# EAGLE board PlytkaZasilanie (EAGLE 9.7.0)
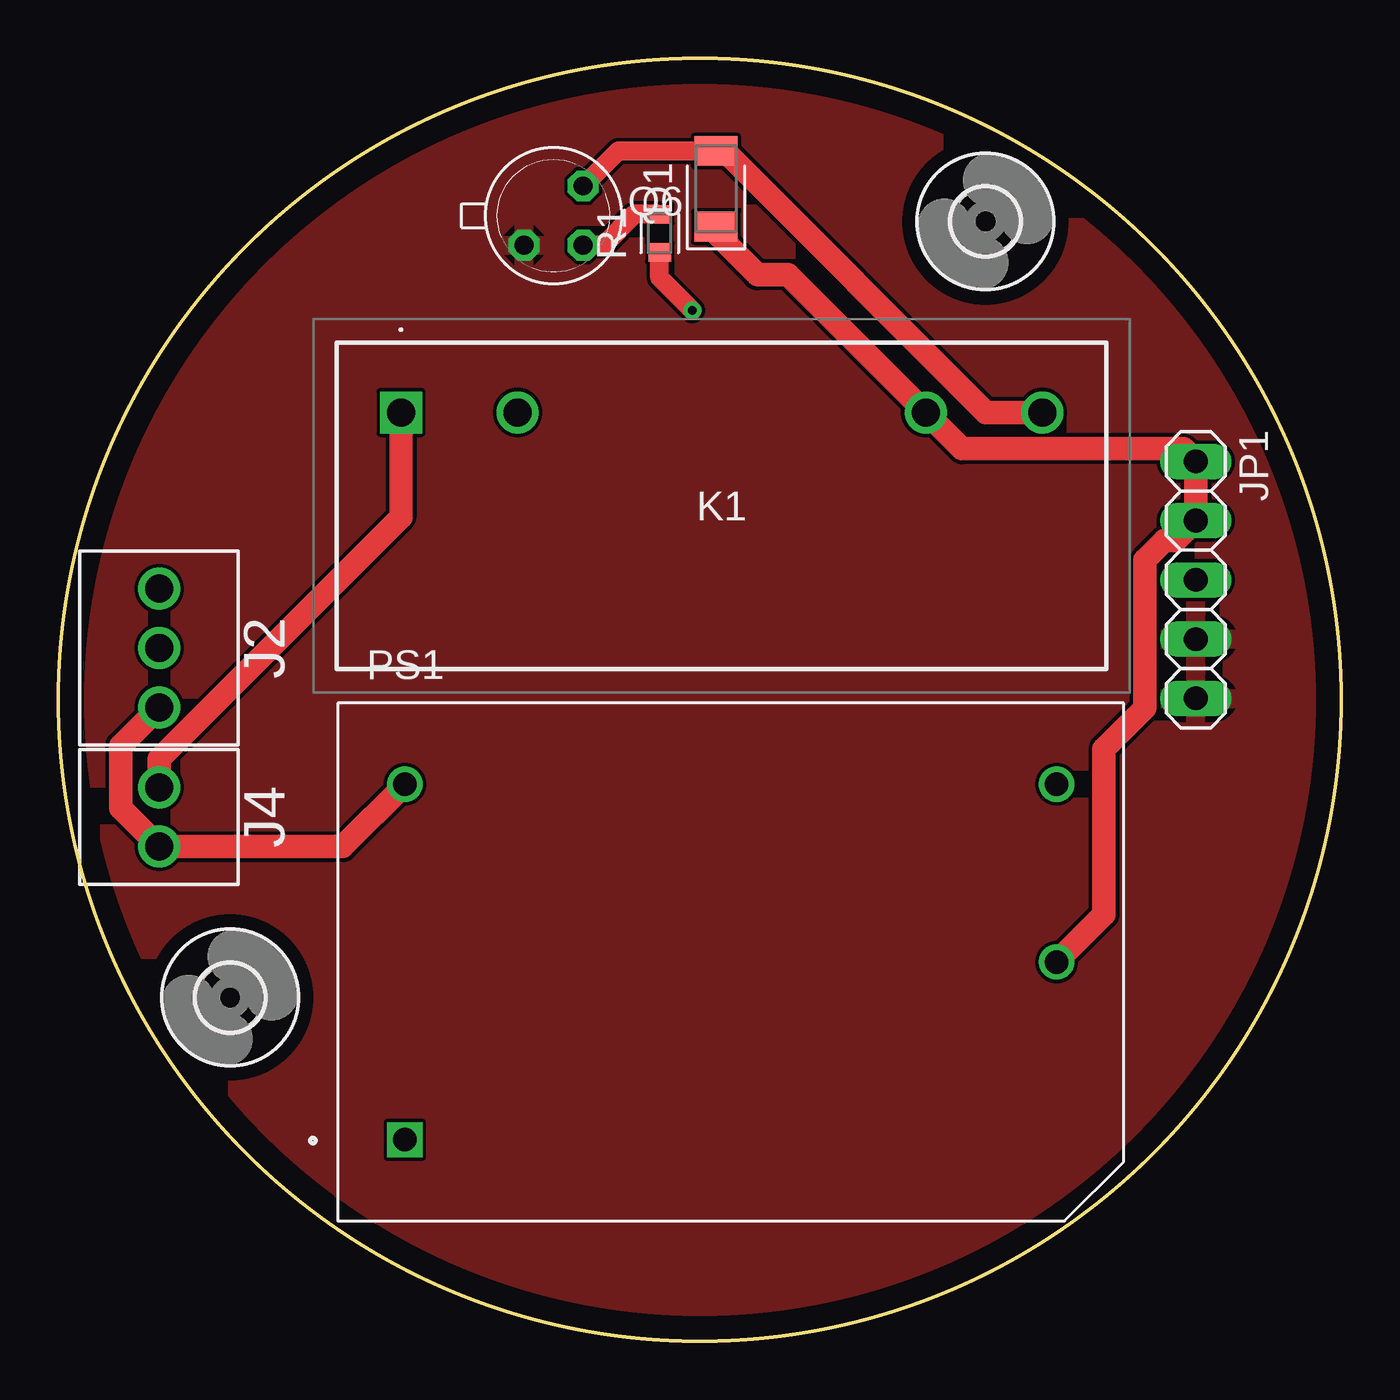
[diagram p0: board, top side]
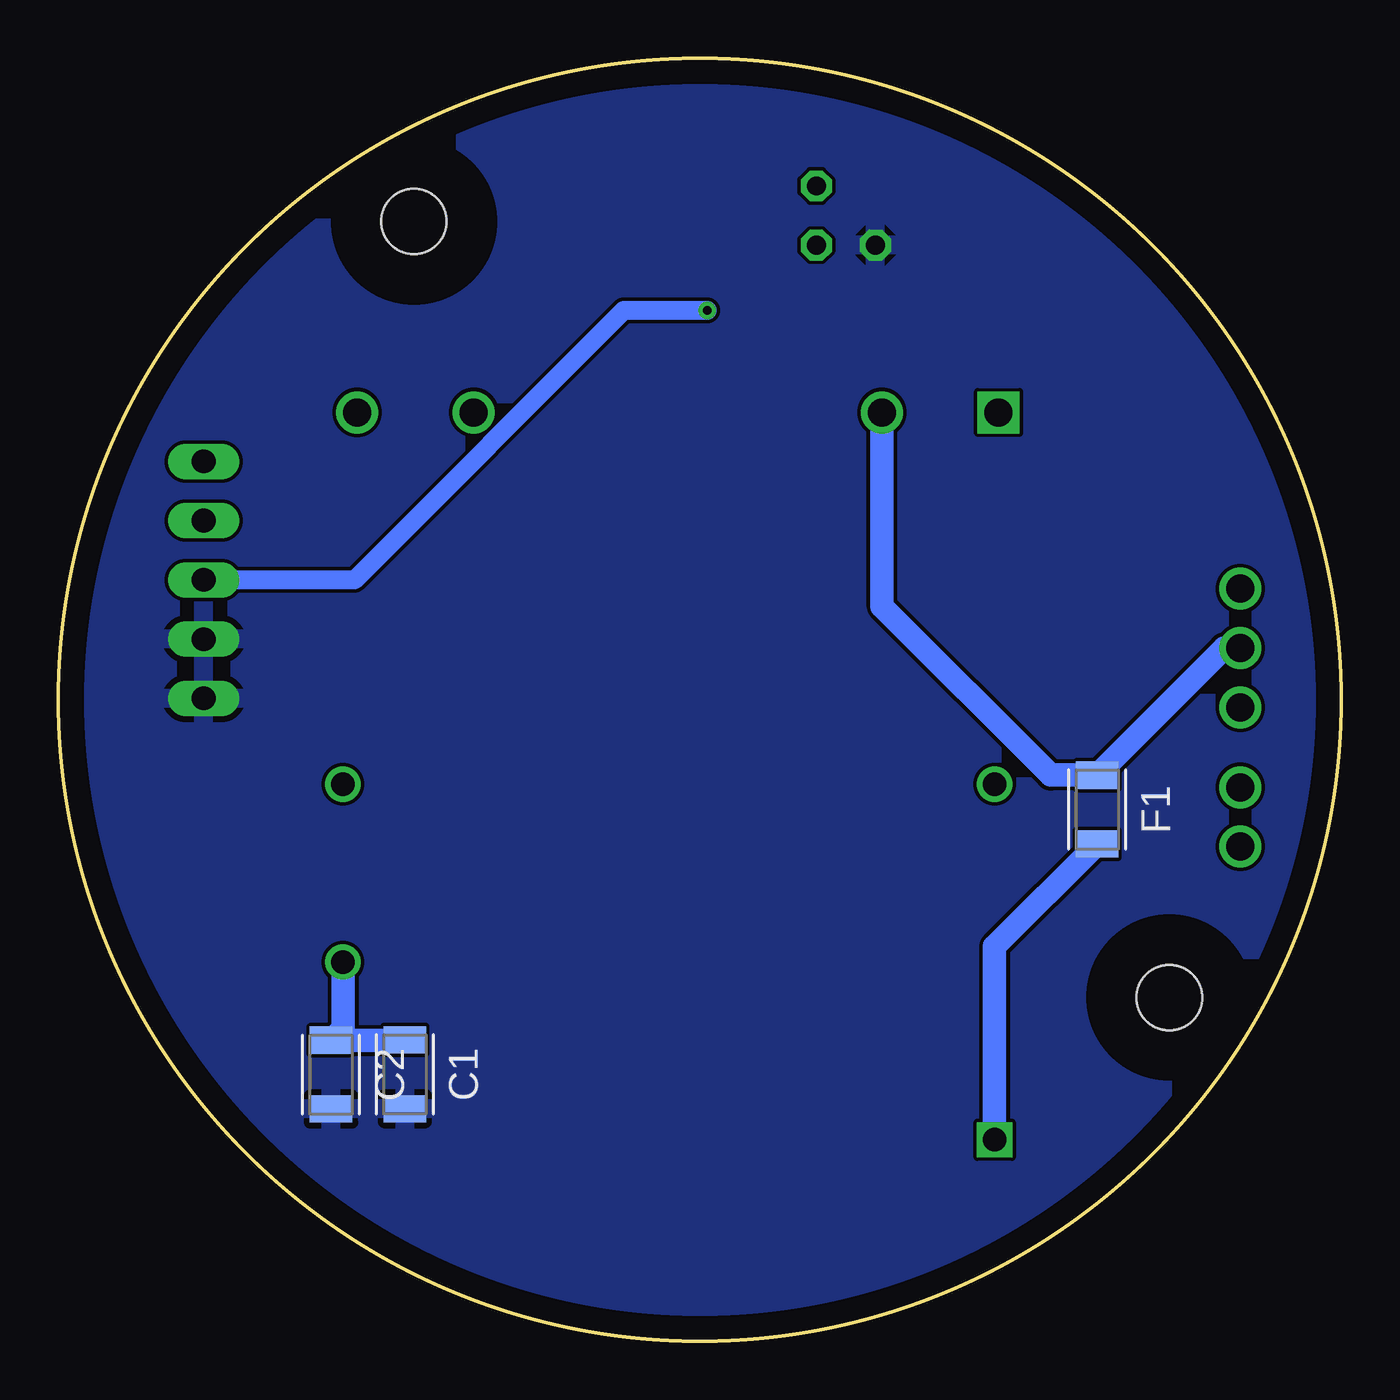
[diagram p1: board, bottom side, seen from below]

Size 55 x 55 mm. Coordinates in mm from the lower left corner, seen from the top.
Outline: circle at 27.5,27.5 radius 27.5
Copper layers (1*16): Top 0.035mm / dielectric 1.5mm / Bottom 0.035mm
Design rules "default": minimum track width 6mil, minimum drill 0.35mm, track to track 6mil, track to pad 6mil, pad to pad 6mil, via to via 6mil, smd to smd 6mil, copper to edge 40mil, drill to drill 6mil, minimum pad ring 10mil, minimum via ring 8mil, stop-mask expansion 4mil, vias tented up to drill 0mil, thermal gap 10mil

## Footprints (pad centres in the part's own frame; a part is rotated, then mirrored left to right if it is on the bottom)
CAPC3216X135 = smd 1.165 x 1.815: 1 -1.475,0; 2 1.475,0
DIOMELF3516 = smd 1.275 x 1.85: 1 -1.62,0; 2 1.62,0
FUSC3215X82N = smd 1.165 x 1.814: 1 -1.475,0; 2 1.475,0
2,8 = hole 2.8: 0,0
TERMBLK_254-3N = drill 1.2: 1 0,0; 2 2.54,0; 3 5.08,0
TERMBLK_254-2N = drill 1.2: 1 0,0; 2 2.54,0
1X05 = drill 1.016 long: 1 -5.08,0; 2 -2.54,0; 3 0,0; 4 2.54,0; 5 5.08,0
G3CN203P1USDC328 = drill 1.2 pad 1.8 square: 1 0,0 | drill 1.2 pad 1.8: 2 -5,0; 3 -22.5,0; 4 -27.5,0
CONV_RAC01-3.3SGB = drill 1 pad 1.5 square: 1 -13.97,-7.62 | drill 1 pad 1.5: 2 -13.97,7.62; 3 13.97,7.62; 4 13.97,0
TO18 = drill 0.813 octagon: 1 -1.27,-1.27; 2 1.27,-1.27; 3 1.27,1.27
RESC1608X60 = smd 0.799 x 0.974: 1 -0.815,0; 2 0.815,0

## Placement (x,y rotation side)
C1  10uF 10V  [CAPC3216X135]  40.14,11.44 270 bottom
C2  100n 10V  [CAPC3216X135]  43.31,11.43 270 bottom
D1  DIODE  [DIOMELF3516]  28.19,49.4 90 top
F1  [FUSC3215X82N]  10.46,22.79 270 bottom
H1  MOUNT-HOLE2.8  [2,8]  7.37,14.73 0 top
H2  MOUNT-HOLE2.8  [2,8]  39.75,48.01 0 top
J2  2828XX-3282834-3  [TERMBLK_254-3N]  4.32,27.18 90 top
J4  2828XX-2282834-2  [TERMBLK_254-2N]  4.32,21.21 90 top
JP1  PINHD-1X5  [1X05]  48.77,32.64 270 top
K1  G3CN-203P1-US_DC3-28  [G3CN203P1USDC328]  14.69,39.82 180 top
PS1  RAC01-3.3SGB  [CONV_RAC01-3.3SGB]  28.83,16.26 0 top
Q6  NPN  [TO18]  21.23,48.26 0 top
R1  4k7  [RESC1608X60]  25.78,47.5 90 top

## Library data of the parts
C1 C2 = Capacitor; CATEGORY: Capacitor
D1 = Diode; CATEGORY: Diode; SUB-CATEGORY: Rectifier
F1 = Circuit-Protection; CATEGORY: Circuit-Protection; SUB-CATEGORY: Fuse
H1 H2 = holes
J2 = Connector; CATEGORY: Fixed Terminal Blocks; DESCRIPTION: Fixed Terminal Blocks 3P TERMINAL BLOCK; MANUFACTURER: TE Connectivity AMP Connectors; MPN: 282834-3; OPERATING_TEMPERATURE: -40°C ~ 105°C; PART_STATUS: Active; PITCH: 0.100" (2.54mm); ROHS_COMPLIANCE: RoHS Compliant; SERIES: Buchanan; SUBCATEGORY: Terminal Blocks; TYPE: Through Hole; Screw - Rising Cage Clamp; Side wire entry, Horizontal with Board
J4 = Connector; CATEGORY: Fixed Terminal Blocks; DESCRIPTION: Fixed Terminal Blocks 2P SIDE ENTRY 2.54mm; MANUFACTURER: TE Connectivity AMP Connectors; MPN: 282834-2; OPERATING_TEMPERATURE: -40°C ~ 105°C; PART_STATUS: Active; PITCH: 0.100" (2.54mm); ROHS_COMPLIANCE: RoHS Compliant; SERIES: Buchanan; SUBCATEGORY: Terminal Blocks; TYPE: Through Hole; Screw - Rising Cage Clamp; Side wire entry, Horizontal with Board
JP1 = Connector; CATEGORY: Headers; DESCRIPTION: Header, Straight, 5 Position; MANUFACTURER: Generic; MPN: Generic; OPERATING_TEMPERATURE: Generic; PART_STATUS: Active; PITCH: 0.100" (2.54mm); ROHS_COMPLIANCE: Generic; SERIES: Generic; SUB-CATEGORY: Headers, Male Pins; TYPE: Board to Board or Cable, Unshrouded, Through Hole, Straight
K1 = SamacSys_Parts; DESCRIPTION: Solid State Relays - PCB Mount SOLID STATE RELAY; HEIGHT: 28mm; MANUFACTURER_NAME: Omron Electronics; MANUFACTURER_PART_NUMBER: G3CN-203P1-US DC3-28; MOUSER_PART_NUMBER: 653-G3CN203P1USDC328; MOUSER_PRICE-STOCK: https://www.mouser.co.uk/ProductDetail/Omron-Automation-and-Safety/G3CN-203P1-US-DC3-28?qs=fQQAKcphggreI%2F4dLh%252B1pA%3D%3D
PS1 = Biblioteka; AVAILABILITY: In Stock; CHECK_PRICES: https://www.snapeda.com/parts/RAC01-05SGB/Recom+Power/view-part/?ref=eda; DESCRIPTION: AC-DC, Converter, 3kV reg, Single Output, 1W, 5V Out, RAC01-GB Series | RECOM Power Inc. RAC01-05SGB; MF: Recom Power; MP: RAC01-05SGB; PACKAGE: DIP-4 Recom Power; PRICE: None; SNAPEDA_LINK: https://www.snapeda.com/parts/RAC01-05SGB/Recom+Power/view-part/?ref=snap
Q6 = Transistor; CATEGORY: Transistor; SUB-CATEGORY: BJT; TYPE: NPN
R1 = Resistor; CATEGORY: Resistor; SUB-CATEGORY: Fixed

## Nets
3V3: C1.1 C2.1 D1.1 JP1.1 JP1.2 K1.3 PS1.4
D1: JP1.3 R1.1
GND: C1.2 C2.2 JP1.4 JP1.5 Q6.1
L: F1.1 J2.2 K1.2
N: J2.1 J4.1 PS1.2
N$1: J4.2 K1.1
N$2: F1.2 PS1.1
N$3: Q6.2 R1.2
N$5: D1.2 K1.4 Q6.3

## Tracks (layer width: path | path; a pad name or v marks a point on that pad's centre or on a via)
3V3
  Top 1.016: PS1.4 44.83,18.29 44.83,25.4 46.58,27.15 46.58,33.48 47.42,34.31 47.9,34.31 JP1.2 JP1.1 48.23,38.26 38.75,38.26 K1.3 31.29,45.72 29.97,45.72 28.19,47.5 D1.1
  Bottom 1.016: PS1.4 42.8,13.41 C2.1 40.15,12.9 C1.1
D1  (via drill 0.35)
  Top 0.813: v27.18,44.2 25.78,45.59 R1.1
  Bottom 0.813: v27.18,44.2 30.75,44.2 42.3,32.64 JP1.3
GND
  pour Bottom: 54.97,0.15 54.97,54.84 0.28,54.84 0.28,0.15
  pour Top: 0.28,0.15 54.97,0.15 54.97,54.97 0.28,54.97
L
  Bottom 1.016: J2.2 5.01,29.72 F1.1 12.46,24.27 19.69,31.5 K1.2
N
  Top 1.016: PS1.2 12.19,21.21 J4.1 2.67,22.86 2.67,25.53 J2.1
N$1
  Top 1.016: K1.1 14.69,35.34 4.32,24.97 J4.2
N$2
  Bottom 1.016: F1.2 14.86,16.92 PS1.1
N$3
  Top 0.813: R1.2 24.69,48.31 23.37,46.99 Q6.2
N$5
  Top 0.813: D1.2 24,51.02 Q6.3
  Top 1.016: D1.2 28.57,51.02 39.78,39.82 K1.4